# Altium PCB PCB1.PcbDoc
Units mm, origin at the board's own origin, x right, y up, seen from the top; angles counter-clockwise.
Board outline 80 x 31 mm, 2 copper layers (L1, L2), stack 1.594 mm thick; 11 components, 19 nets, 105 pads, 23 vias.
Unrouted connection lines stored in the file: 1.
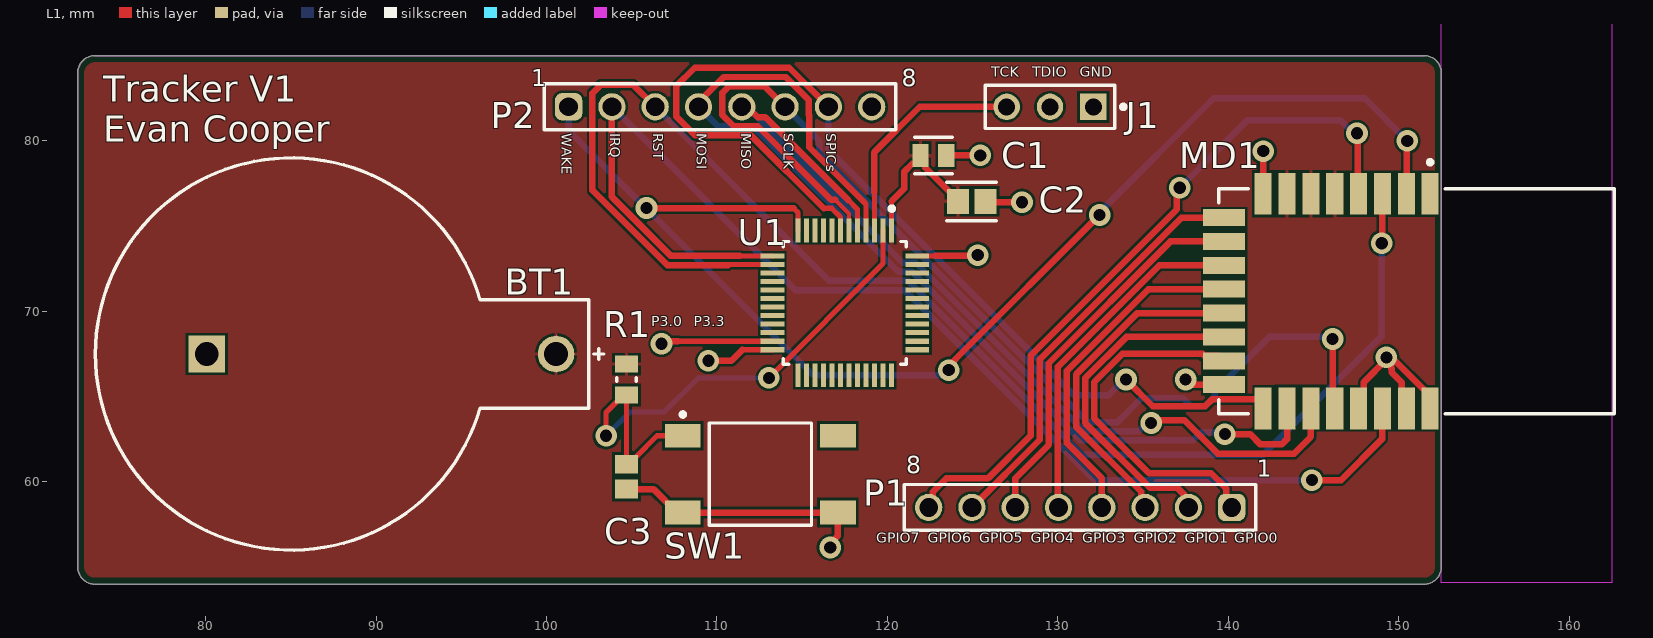
[diagram p0: L1 view]
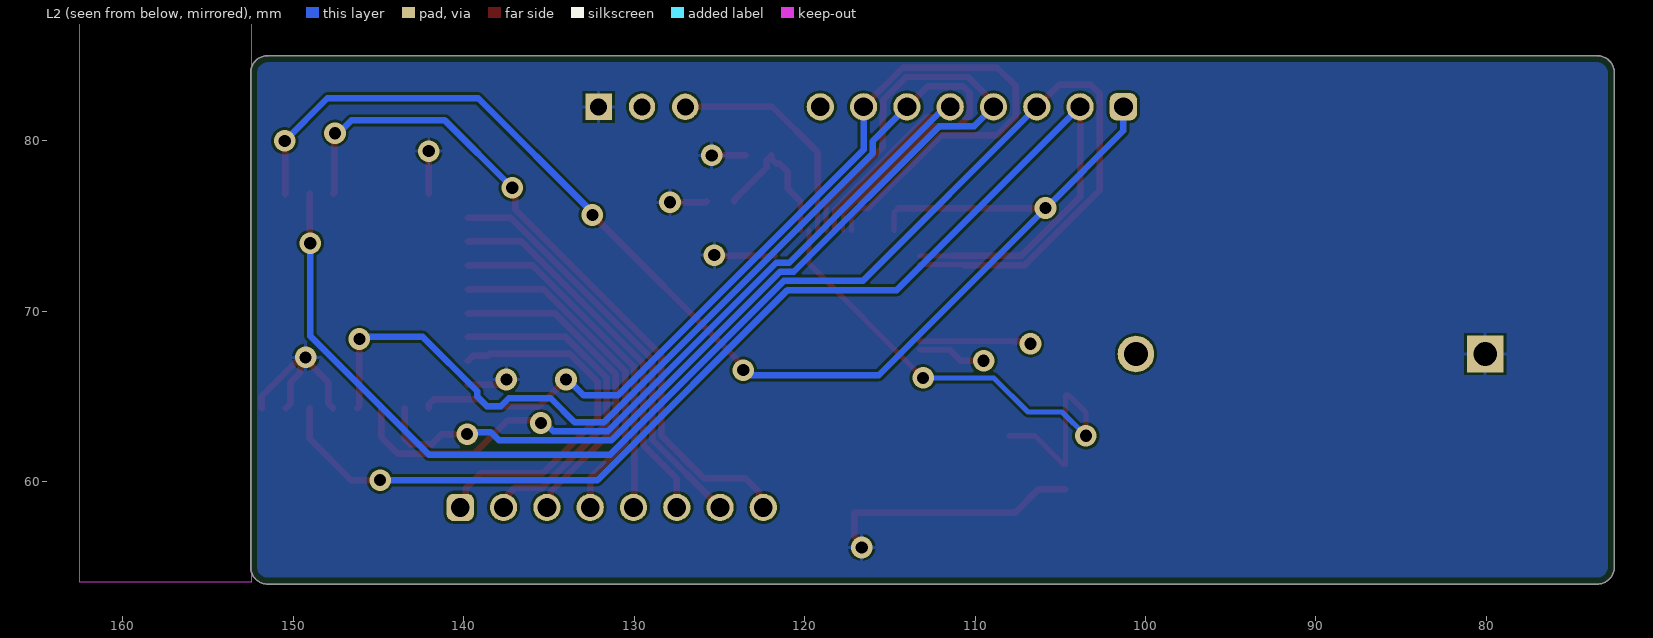
[diagram p1: L2 view, seen from below]
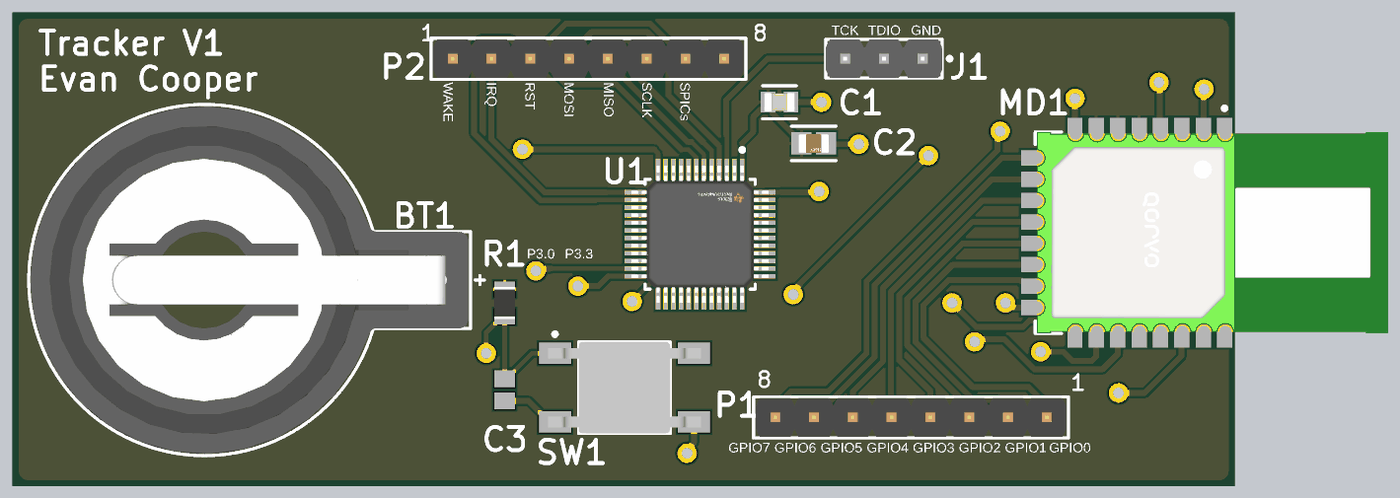
[diagram p2: 3D render of the assembled board from above, using the file's embedded part models]

## Layer stack, top to bottom
Top Solder: solder mask 0.0025, Solder Resist, Dk 1
L1: signal copper 0.035
Core: dielectric 1.524, FR-4, Dk 4.6
L2: signal copper 0.035
Bottom Solder: solder mask 0.0025, Solder Resist, Dk 1

## Board outline
73.5,54 151.5,54 ccw(c151.5,55) 152.5,55 152.5,84 ccw(c151.501,84) 151.501,84.999 73.499,84.999 ccw(c73.499,84) 72.5,84 72.5,55 ccw(c73.5,55)

## Design rules (kind name [scope] priority, off if disabled: settings)
BoardOutlineClearance [All] p1: gap=0.381 ignorepadtopadclearanceinfootprint=FALSE
Clearance [All] p1: gap=0.152 ignorepadtopadclearanceinfootprint=FALSE
ComponentClearance [All] p1: gap=0.025 collisioncheckmode=3 verticalgap=0.025 showdistances=FALSE
DiffPairsRouting [All] p1: maxlimit=10 minlimit=0.152 mostfreqgap=0.203 toplayer_minwidth=0.152 toplayer_maxwidth=0.381 toplayer_prefwidth=0.203 bottomlayer_minwidth=0.152 bottomlayer_maxwidth=0.381 bottomlayer_prefwidth=0.203 substack1={0B7C5F7A-8336-4FBE-85F9-299DA205205F} toplayer_{0b7c5f7a-8336-4fbe-85f9-299da205205f}_minwidth=0.381 toplayer_{0b7c5f7a-8336-4fbe-85f9-299da205205f}_maxwidth=0.381 toplayer_{0b7c5f7a-8336-4fbe-85f9-299da205205f}_prefwidth=0.381 bottomlayer_{0b7c5f7a-8336-4fbe-85f9-299da205205f}_minwidth=0.381 bottomlayer_{0b7c5f7a-8336-4fbe-85f9-299da205205f}_maxwidth=0.381 bottomlayer_{0b7c5f7a-8336-4fbe-85f9-299da205205f}_prefwidth=0.381 substack2={6D2DA1B5-E15E-444F-818C-66341082B678} toplayer_{6d2da1b5-e15e-444f-818c-66341082b678}_minwidth=0.381 toplayer_{6d2da1b5-e15e-444f-818c-66341082b678}_maxwidth=0.381 toplayer_{6d2da1b5-e15e-444f-818c-66341082b678}_prefwidth=0.381 bottomlayer_{6d2da1b5-e15e-444f-818c-66341082b678}_minwidth=0.381 bottomlayer_{6d2da1b5-e15e-444f-818c-66341082b678}_maxwidth=0.381 bottomlayer_{6d2da1b5-e15e-444f-818c-66341082b678}_prefwidth=0.381 maxuncoupledlength=12.7
HoleSize [All] p1: absolutevalues=TRUE maxlimit=6.731 minlimit=0.33 maxpercent=80.000 minpercent=20.000
HoleToHoleClearance [All] p1: gap=0.254 allowstackedmicrovias=FALSE
MinimumAnnularRing [All] p1: minimumring=0.178
MinimumSolderMaskSliver [All] p1: minsoldermaskwidth=0
PlaneClearance [All] p1: clearance=0.254
PlaneConnect [All] p1: planeconnectstyle=Direct reliefexpansion=0.406 reliefentries=4 reliefconductorwidth=0.152 reliefairgap=0.152
PolygonConnect [All] p1: connectstyle=Relief reliefconductorwidth=0.203 reliefentries=4 polygonreliefangle="90 Angle" airgapwidth=0.152
RoutingCorners [All] p1: cornerstyle=45-Degree minsetback=1.25 maxsetback=1.25
RoutingVias [All] p1: holewidth=0.381 width=0.762 viastyle="Through Hole" minholewidth=0.33 minwidth=0.686 maxholewidth=2.54 maxwidth=2.896
SilkToSilkClearance [All] p1: silktosilkclearance=0
SilkToSolderMaskClearance [IsPad] p1: minsilkscreentomaskgap=0.152 clearancetoexposedcopper=TRUE
SolderMaskExpansion [All] p1: expansion=0.075 istentingtop=FALSE
Width [All] p1: maxlimit=10.16 minlimit=0.152 preferedwidth=0.254 bottomlayer_prefwidth=0.203 substack1={0B7C5F7A-8336-4FBE-85F9-299DA205205F} toplayer_{0b7c5f7a-8336-4fbe-85f9-299da205205f}_prefwidth=0.203 bottomlayer_{0b7c5f7a-8336-4fbe-85f9-299da205205f}_prefwidth=0.203 substack2={6D2DA1B5-E15E-444F-818C-66341082B678} toplayer_{6d2da1b5-e15e-444f-818c-66341082b678}_prefwidth=0.203 bottomlayer_{6d2da1b5-e15e-444f-818c-66341082b678}_prefwidth=0.203 minimp=50.000000 maximp=50.000000 favimp=50.000000
20 further rules are at their usual default settings.

## Components (designator, comment, footprint, x,y, rotation, side; value= is the part's Value field where it differs from the comment)
BT1 "101" FP-101-MFG 88,67.5 r0 top
C1 "C0805C106K8PACTU" FP-C0805C-DG-MFG 122.7,79.15 r0 top value=10uF
C2 "08051C104K4T2A" FP-0805-L_2_01_0_2-W_1_25-IPC_B 124.944,76.45 r0 top (schematic designator C?)
C3 "VJ0805D102KXAAJ" CAPC2013X145X48LL20T23 104.7,60.3 r90 top
J1 "90120-0123" FP-90120-0123-MFG 129.54,82 r180 top
MD1 "DWM1000" FP-DWM1000-MFG 151.045,70.6 r270 top
P1 "61300811121" 61300811121 131.31,58.5 r180 top
P2 "61300811121" 61300811121 110.19,82 r0 top
R1 "RC0805FR-0747KL" RESC2013X60X35NL10T20 104.7,66 r90 top
SW1 "FSM4JSMATR" TECO-FSM4JSMATR_V 112.55,60.45 r90 top
U1 "MSP430FR2476TPTR" FP-PT0048A-MFG 117.5,70.5 r270 top

## Footprints (in the part's own frame and the unit in brackets; to place one, negate y for a bottom-side part, rotate by r counter-clockwise, add the part's x,y. Pads: shape width x height; smd on the part's side, far side on the other; paste and mask are expansions set on the pad)
61300811121 [mm] "Pin Header, pitch 2.54 mm, THT, Vertical, single row, 8p"
  rrect50% 1.6x1.6 hole 1.1: 1(-8.89,0)
  round 1.6 hole 1.1: 2(-6.35,0) 3(-3.81,0) 4(-1.27,0) 5(1.27,0) 6(3.81,0) 7(6.35,0) 8(8.89,0)
  silkscreen extent -10.31,-1.34 10.31,1.35, body extent -10.16,-1.27 10.16,1.27, height 8.57
CAPC2013X145X48LL20T23 [mm] "Chip Capacitor, 2-Leads, Body 2.00x1.25mm, IPC High Density"
  rect 1.1x1.35 smd: 1(-0.725,0) 2(0.725,0)
  body extent -1.1,-0.72 1.1,0.72, height 1.45
FP-101-MFG [mm]
  rect 2.145x2.145 hole 1.395 paste-2539.97 mask+0: 1(-7.925,0)
  round 2.145 hole 1.395 paste-2539.97 mask+0: 2(12.565,0)
  silkscreen extent -14.46,-11.5 15.38,11.5, body extent -14.37,-11.38 14.34,11.38, height 10.77
FP-0805-L_2_01_0_2-W_1_25-IPC_B [mm]
  rect 1.305x1.456 smd paste+0 mask+0: 1(-0.806,0) 2(0.806,0)
  silkscreen extent -1.46,-1.13 1.46,1.13, body extent -1.71,-0.98 1.71,0.98, height 0.25
FP-90120-0123-MFG [mm]
  rect 1.55x1.55 hole 1 paste-2539.97 mask+0: 1(-2.54,0)
  round 1.55 hole 1 paste-2539.97 mask+0: 2(0,0) 3(2.54,0)
  silkscreen extent -4.43,-1.27 3.81,1.27, body extent -3.91,-1.37 3.91,1.37, height 0.25
FP-C0805C-DG-MFG [mm]
  rect 0.95x1.35 smd paste+0 mask+0: 1(-0.75,0) 2(0.75,0)
  silkscreen extent -1.11,-1.08 1.1,1.07, body extent -1.4,-0.85 1.4,0.85, height 0.25
FP-DWM1000-MFG [mm]
  rect 2.45x1 smd paste+0 mask+0: 1(-6.295,0.8) 2(-6.295,-0.6) 3(-6.295,-2) 4(-6.295,-3.4) 5(-6.295,-4.8) 6(-6.295,-6.2) 7(-6.295,-7.6) 8(-6.295,-9) 17(6.295,-9) 18(6.295,-7.6) 19(6.295,-6.2) 20(6.295,-4.8) 21(6.295,-3.4) 22(6.295,-2) 23(6.295,-0.6) 24(6.295,0.8)
  rect 1x2.45 smd paste+0 mask+0: 9(-4.9,-11.295) 10(-3.5,-11.295) 11(-2.1,-11.295) 12(-0.7,-11.295) 13(0.7,-11.295) 14(2.1,-11.295) 15(3.5,-11.295) 16(4.9,-11.295)
  Keep-Out Layer region: -16.501,1.411 16.499,1.411 16.499,11.486 -16.501,11.486
  Keep-Out Layer region: -16.501,1.411 16.499,1.411 16.499,11.486 -16.501,11.486
  silkscreen extent -8.27,-11.6 6.6,11.6, body extent -7.62,-12.62 7.62,11.7, height 0.25
FP-PT0048A-MFG [mm]
  rect 1.4x0.3 smd paste-1000 mask+0: 1(-4.25,2.75) 2(-4.25,2.25) 3(-4.25,1.75) 4(-4.25,1.25) 5(-4.25,0.75) 6(-4.25,0.25) 7(-4.25,-0.25) 8(-4.25,-0.75) 9(-4.25,-1.25) 10(-4.25,-1.75) 11(-4.25,-2.25) 12(-4.25,-2.75) 25(4.25,-2.75) 26(4.25,-2.25) 27(4.25,-1.75) 28(4.25,-1.25) 29(4.25,-0.75) 30(4.25,-0.25) 31(4.25,0.25) 32(4.25,0.75) 33(4.25,1.25) 34(4.25,1.75) 35(4.25,2.25) 36(4.25,2.75)
  rect 0.3x1.4 smd paste-1000 mask+0: 13(-2.75,-4.25) 14(-2.25,-4.25) 15(-1.75,-4.25) 16(-1.25,-4.25) 17(-0.75,-4.25) 18(-0.25,-4.25) 19(0.25,-4.25) 20(0.75,-4.25) 21(1.25,-4.25) 22(1.75,-4.25) 23(2.25,-4.25) 24(2.75,-4.25) 37(2.75,4.25) 38(2.25,4.25) 39(1.75,4.25) 40(1.25,4.25) 41(0.75,4.25) 42(0.25,4.25) 43(-0.25,4.25) 44(-0.75,4.25) 45(-1.25,4.25) 46(-1.75,4.25) 47(-2.25,4.25) 48(-2.75,4.25)
  silkscreen extent -5.65,-3.6 3.6,3.6, body extent -5.05,-5.05 5.05,5.05, height 0.25
RESC2013X60X35NL10T20 [mm] "Chip Resistor, 2-Leads, Body 2.1x1.35mm, IPC Medium Density"
  rect 1x1.35 smd: 1(-0.9,0) 2(0.9,0)
  silkscreen extent -0.1,-0.58 0.1,0.58, body extent -1.05,-0.68 1.05,0.67, height 0.6
TECO-FSM4JSMATR_V [mm] "SMD, 4-Leads, Body 6x6mm, Pitch 4.5mm"
  rect 1.4x2.1 smd: 1(2.25,4.55) 2(2.25,-4.55) 3(-2.25,4.55) 4(-2.25,-4.55)
  silkscreen extent -3,-3 3.62,4.67, body extent -3,-5 3,5, height 5.08

## Part data
BT1: library part CMP-19636-000018-1, "BATTERY HOLDER COIN 20MM PC PIN", Max Operating Temperature=145°C, Min Operating Temperature=-50°C, Package Quantity=1, Body Material=PBT, Contact Plating=Tin, Lead Free="Lead Free", Material=Steel, Mount="Through Hole", Number of Batteries=1, Number of Cells=1, Packaging=Bag, REACH SVHC="No SVHC", Series=-, Termination="PC Pin"
C1: library part CMP-2007-03243-2, "CAP CER 10UF 10V X5R 0805", 3DS Part Number=220-00001, Capacitance=10uF, Manufacturer=Kemet, Package=C0805C-DG, Temperature="-55°C to +85°C", Temperature Characteristic=X5R, Temperature Coefficient=15%, Temperature Range High=+85°C, Temperature Range Low=-55°C, Tolerance=10%, Voltage=10V, Automotive=No, Category=Cap, ComponentLink2Description=Datasheet, ComponentLink2URL=https://content.kemet.com/datasheets/KEM_C1006_X5R_SMD.pdf, Device Class L1="Passive Components", Device Class L2=Capacitors, Device Class L3="Ceramic Capacitors", Digikey Description="CAP CER 10UF 10V X5R 0805", Height=1.4mm, Ipc Land Pattern Name=CAPC200125X125, Lead Free=Yes, Manufacturer Part Number=C0805C106K8PACTU, Material=Ceramic, Mouser Description="CAP CER 10UF 10V X5R 0805", Octopart=https://octopart.com/c0805c106k8pactu-kemet-98697, RoHS=TRUE, Voltage Rating=10V
C2: library part CMP-2007-04172-2, "Automotive Ceramic Capacitor, 0805, 100nF, 10%, X7R, 15%, 100V", Capacitance=100nF, Case Code (Imperial)=0805, Case Code (Metric)=2012, Dielectric=X7R, Dielectric Material=Ceramic, Max Operating Temperature=125°C, Min Operating Temperature=-55°C, Package Quantity=1, Ratings=AEC-Q200, Tolerance=10%, Voltage=100V, Case/Package=0805, Construction=Flat, Depth=1.25mm, Height=1.4mm, Lead Free="Lead Free", Length=2.01mm, Mount="Surface Mount", Number of Pins=2, Packaging="Tape and Reel", Radiation Hardening=No, REACH SVHC="No SVHC", RoHS Compliant=Yes, Series=-, Termination=SMD/SMT, Thickness=0.055inch, Voltage Rating=100V, Voltage Rating (DC)=100V, Width=0.049inch
C3: library part CMP-2007-03135-1, Manufacturer=Vitramon, Part Number=VJ0805D102KXAAJ
J1: library part CMP-04776-000237-1, "CONN HEADER VERT 3POS 2.54MM", Color=Black, Contact Resistance=20mR, Current Rating=3A, Max Operating Temperature=125°C, Max Voltage Rating (DC)=350.35kV, Min Operating Temperature=-55°C, Voltage Rating=350V, Contact Gender=Male, Contact Material=Brass, Contact Mating Length=6.75mm, Contact Plating=Tin, Contact Post Length=2.9mm, Gender=Male, Glow Wire Compliant=Non-compliant, Housing Color=Black, Housing Material=Polyester, Lead Free="Lead Free", Mount="Through Hole", Number of Circuits=3, Number of Contacts=3, Number of Positions=3, Number of Rows=1, Orientation=Vertical, Packaging=Tray, Pitch=2.54mm, Radiation Hardening=No, REACH SVHC="No SVHC", RoHS Compliant=Yes, Series=90120, Termination=Solder, Voltage Rating (AC)=350V
MD1: library part CMP-231853-000001-1, "RX TXRX MODULE 802.15.4 CHIP SMD"
P1 P2: library part CMP-1502-01076-2, Color=Black, Contact Resistance=20mΩ, Current Rating=3A, Max Operating Temperature=105°C, Min Operating Temperature=-40°C, Operating Supply Voltage=250V, Connector Type="Male Pin", Contact Material=Copper, Contact Mating Length=5.9944mm, Contact Plating=Gold, Gender=Male, Height=8.54mm, Lead Pitch=2.54mm, Mount="Through Hole", NexarPartId=32855533, Number of Contacts=8, Number of Pins=8, Number of Positions=8, Number of Rows=1, Orientation=Vertical, Packaging=Bulk, Pitch=2.54mm, REACH SVHC=Unknown, RoHS=Compliant, Termination=Solder, Voltage Rating=250V
R1: library part CMP-1659-00011-4, "Chip Resistor, 47 KOhm, +/- 1%, 0.125 W, -55 to 155 degC, 0805 (2012 Metric), RoHS, Tape and Reel", Manufacturer=Yageo, Max Operating Temperature="155 degC", Min Operating Temperature="-55 degC", Package Quantity=200, Voltage Rating="150 V", ComponentLink1Description="Manufacturer URL", ComponentLink1URL=http://www.yageo.com/, ComponentLink2Description=Datasheet, ComponentLink2URL=http://www.yageo.com/documents/recent/PYu-RC_Group_51_RoHS_L_04.pdf, DatasheetVersion="Rev. 4, 02/2016", Height="0.5 mm", Length="2 mm", Mount="Surface Mount", Mounting Technology="Surface Mount", PackageDescription="2-Pin Surface Mounted Device, Body 2 x 1.25 mm", PackageReference=0805, Packaging="Tape and Reel", Pins=2, REACH SVHC="No SVHC", RoHSCompliant=true
SW1: library part CMP-2000-07486-1, "Micro Miniature Push Button Switch FSM JSM, 50 mA, -35 to 85 degC, 4-Pin SMD, RoHS, Tape and Reel", Capacitance=0f, Case\/Package=SMD/SMT, Contact Current Rating=50mA, Contact Resistance=100mOhm, Manufacturer="TE Connectivity", Max Operating Temperature=85degC, Max Voltage Rating (DC)=12V, Min Operating Temperature=-35degC, Operating Force=160gf, Package Description="4-Pin Surface Mount Device, Body 6 x 6 mm, Pitch 4.5 mm", Package Quantity=1200, Voltage Rating (DC)=24V, Actuator Length=0.055inch, Actuator Material=Polyamide, Contact Material=CopperAlloy, Contact Plating=Silver, Current Rating=50mA, Datasheet URL=http://www.te.com/commerce/DocumentDelivery/DDEController?Action=showdoc&DocId=Customer+Drawing%7F2-1437565-7%7FV%7Fpdf%7FEnglish%7FENG_CD_2-1437565-7_V.pdf%7F4-1437565-2, Datasheet Version="Rev. V, 02/2015", Electrical Life=100000Cycles, Illumination Type=Illuminated, Manufacturer URL=http://www.te.com/, Mechanical Life=100000Cycles, Mount=SurfaceMount, Mounting Technology=SurfaceMount, Orientation=Straight, Package Reference=FSM4JSMATR, Packaging=TapeandReel, REACH SVHC=Unknown, RoHSCompliant=true, Switch Travel=0.25mm, Termination=GullWing, Throw Configuration=SPST
U1: library part CMP-04869-000090-1, "IC MCU 16BIT 64.5KB FRAM 48LQFP"

## Via types
v1: diameter 1.27, hole 0.711, L1 to L2, 23 vias

## Nets (pads, with @x,y where several pads share a name; then routed paths per layer and width w, separated by ;. In a path a pad name is that pad's centre, name@x,y a point inside that pad or via, vN(x,y) a via of type N, cw(c..) or ccw(c..) an arc to the next point about the centre after c; other vN are vias at no path point)
GND: BT1.1 C1.2 C2.2 C3.1 J1.1 MD1.8 MD1.16 MD1.21 MD1.23 MD1.24 SW1.3 SW1.4 U1.48 | length 38.8
  L1 w0.305: U1.48 122.8,73.25
  L1 w0.381: C3.1 106.275,59.575 107.65,58.2 SW1.3 SW1.4 117.1,56.841 116.65,56.391 v1(116.65,56.15) ; 122.8,73.25 125.25,73.25 v1(125.3,73.3) ; C1.2 v1(125.45,79.15) ; C2.2 125.8,76.4 v1(127.9,76.4) ; v1(137.5,66) 137.741,66 138.041,65.7 MD1.16 ; MD1.8 142.048,76.897 142.048,79.398 v1(142.05,79.4) ; MD1.21 147.955,64.615 147.955,65.855 149.272,67.172 v1(149.272,67.3) ; v1@149.4,67.3 149.57,67.13 149.442,67.002 149.442,66.889 149.57,66.761 149.57,66.637 149.575,66.632 149.575,66.425 150.184,65.816 150.184,64.566 MD1.23 ; v1@149.658,67.155 149.683,67.13 149.745,67.13 151.845,65.03 MD1.24
GPIO0: MD1.15 P1.1 | length 21.3
  L1 w0.381: MD1.15 139.44,67.409 138.583,67.409 138.492,67.5 133.78,67.5 132.134,65.853 132.134,63.716 135.35,60.5 139,60.5 139.894,59.606 139.894,58.806 P1.1
GPIO1: MD1.14 P1.2 | length 20.2
  L1 w0.381: P1.2 137.427,58.733 137.427,59.233 137.017,59.643 135.416,59.643 131.6,63.458 131.6,66.074 134.026,68.5 MD1.14
GPIO2: MD1.13 P1.3 | length 19.7
  L1 w0.381: P1.3 134.887,58.733 134.887,59.418 131.067,63.237 131.067,66.295 134.672,69.9 MD1.13
GPIO3: MD1.12 P1.4 | length 20.1
  L1 w0.381: P1.4 132.58,60.22 130.534,62.266 130.534,66.516 135.317,71.3 MD1.12
GPIO4: MD1.11 P1.5 | length 20.5
  L1 w0.381: P1.5 130,58.54 130,66.737 135.963,72.7 MD1.11
GPIO5: MD1.10 P1.6 | length 22.5
  L1 w0.381: P1.6 127.5,60.2 129.467,62.167 129.467,66.958 136.609,74.1 MD1.10
GPIO6: MD1.9 P1.7 | length 24.6
  L1 w0.381: P1.7 128.933,62.473 128.933,67.179 137.254,75.5 MD1.9
GPIO7: MD1.4 P1.8 | length 42.2
  L1 w0.381: P1.8 122.653,58.733 122.653,59.395 123.458,60.2 125.9,60.2 128.4,62.7 128.4,67.4 136.98,75.98 136.98,77.08 v1(137.15,77.25) ; v1(147.55,80.45) 147.598,80.402 147.598,76.942 MD1.4
  L2 w0.381: v1(137.15,77.25) 141.1,81.2 146.594,81.2 147.344,80.45 v1(147.55,80.45)
IRQ: MD1.22 P2.2 U1.13 | length 73.2
  L1 w0.305: 111.35,73.25 U1.13
  L1 w0.381: P2.2 103.84,76.713 107.303,73.25 111.35,73.25 ; v1(144.9,60.1) 146.614,60.1 149.023,62.508 149.023,64.282 MD1.22
  L2 w0.381: P2.2 114.588,71.252 121.003,71.252 132.154,60.1 v1(144.9,60.1)
MISO: MD1.19 P2.5 U1.5 | length 54.9
  L1 w0.305: 117.718,76.518 118.25,75.986 U1.5
  L1 w0.381: P2.5 111.79,82 112.399,81.39 112.845,81.39 117.718,76.518 ; v1(135.476,63.455) 135.646,63.625 137.415,63.625 139.381,61.659 143.87,61.659 144.845,62.633 MD1.19
  L2 w0.381: P2.5 111.75,82 120.898,72.852 121.665,72.852 131.551,62.967 134.747,62.967 135.235,63.455 v1(135.476,63.455)
MOSI: MD1.18 P2.4 U1.4 | length 62
  L1 w0.305: 118.65,76.4 118.75,76.3 U1.4
  L1 w0.381: P2.4 108.92,82.275 110.395,83.75 114.036,83.75 115.397,82.389 115.397,81.527 115.423,81.501 115.423,79.627 118.65,76.4 ; v1(139.8,62.8) 141.281,62.8 141.889,62.192 143.129,62.192 143.445,62.508 MD1.18
  L2 w0.381: P2.4 110.063,80.857 112.093,80.857 120.632,72.318 121.445,72.318 131.33,62.433 137.933,62.433 138.403,62.903 139.697,62.903 v1(139.8,62.8)
RST: MD1.3 P2.3 U1.14 | length 84.8
  L1 w0.305: 110.65,72.717 110.683,72.75 U1.14
  L1 w0.381: P2.3 105.08,83.3 103.2,83.3 102.7,82.8 102.7,82.476 102.697,82.473 102.697,81.527 102.7,81.524 102.7,77.099 107.082,72.717 110.65,72.717 ; v1(149,74) 149.023,74.023 149.023,76.872 MD1.3
  L2 w0.381: P2.3 116.595,71.785 121.224,71.785 131.409,61.6 142.05,61.6 149,68.55 v1(149,74)
SBWTCK: J1.3 U1.3 | length 13.5
  L1 w0.305: 119.217,77 119.25,76.967 U1.3
  L1 w0.381: 119.217,77 119.217,79.317 121.9,82 J1.3
SBWTDIO: C3.2 J1.2 R1.1 SW1.1 U1.2 | length 33.5
  L1 w0.305: v1(103.5,62.7) 103.5,64.075 104.525,65.1 R1.1 C3.2 104.825,61.025 105.223,61.423 105.223,61.43 106.493,62.7 SW1.1 ; v1(113.05,66.1) 119.75,72.8 U1.2
  L2 w0.305: v1(103.5,62.7) 104.9,64.1 106.9,64.1 108.9,66.1 v1(113.05,66.1)
SCLK: MD1.20 P2.6 U1.6 | length 63.5
  L1 w0.254: 116.932,76.549 117.75,75.731 U1.6
  L1 w0.381: P2.6 112.783,83.217 110.717,83.217 110.317,82.817 110.317,81.527 110.987,80.857 112.391,80.857 116.698,76.549 116.932,76.549 ; v1(146.122,68.378) 146.122,64.428 MD1.20
  L2 w0.381: P2.6 116.007,79.993 116.007,79.265 131.772,63.5 133.5,63.5 134.9,64.9 137.356,64.9 137.828,64.428 138.638,64.428 139.211,65 139.211,65.311 142.4,68.5 146,68.5 v1(146.122,68.378)
SPICs: MD1.17 P2.7 U1.7 | length 60.6
  L1 w0.305: 116.267,76.05 116.731,76.05 117.248,75.533 117.248,74.752 U1.7
  L1 w0.381: 116.267,76.05 111.993,80.324 108.726,80.324 107.603,81.447 107.603,83.203 108.7,84.3 114.24,84.3 P2.7 ; v1(134,66) 135.572,64.428 138.638,64.428 139.067,64.857 141.736,64.857 142.045,64.548 MD1.17
  L2 w0.381: P2.7 116.54,79.486 130.959,65.067 132.958,65.067 133.891,66 v1(134,66)
VCC: BT1.2 C1.1 C2.1 MD1.5 MD1.6 MD1.7 R1.2 U1.1 | length 8.8
  L1 w0.305: U1.1 120.25,76.471
  L1 w0.381: 120.25,76.471 120.979,77.2 120.979,78.179 121.465,78.666 121.666,78.666 121.95,78.95 C1.1 122.235,78.866 122.235,78.43 124.138,76.526 C2.1
WAKEUP: MD1.2 P2.1 U1.12 | length 77.8
  L1 w0.305: 114.5,76.05 114.748,75.802 114.748,74.752 U1.12
  L1 w0.381: v1(105.868,76.068) 105.886,76.05 114.5,76.05 ; v1(123.6,66.55) 123.6,66.791 124.047,67.238 124.047,67.247 v1(132.45,75.65) ; MD1.2@150.472,76.867 MD1.2 150.472,76.922 150.472,79.973 v1(150.5,80)
  L2 w0.381: P2.1 101.3,80.6 105.832,76.068 v1(105.868,76.068) ; v1@105.85,76.05 115.65,66.25 123.059,66.25 123.359,66.55 v1(123.6,66.55) ; v1(132.45,75.65) 132.45,75.8 139.15,82.5 148,82.5 v1(150.5,80)
pads on no net: MD1.1 P2.8 SW1.2 U1.8 U1.9 U1.10 U1.11 U1.15 U1.16 U1.17 U1.18 U1.19 U1.20 U1.21 U1.22 U1.23 U1.24 U1.25 U1.26 U1.27 U1.28 U1.29 U1.30 U1.31 U1.32 U1.33 U1.34 U1.35 U1.36 U1.37 U1.38 U1.39 U1.40 U1.41 U1.42 U1.43 U1.44 U1.45 U1.46 U1.47
copper on no net: | length 10.6
  L1 w0.305: 107.711,68.25 113.25,68.25 ; 111.5,67.75 113.25,67.75
  L1 w0.381: v1(106.75,68.1) 106.9,68.25 107.711,68.25 ; v1(109.5,67.1) 110.85,67.1 111.297,67.547 111.5,67.75

## Polygon pours and split planes (outlines as drawn)
GND on L2 "GndPour" (solid, pour order 3): 73.5,54 151.5,54 ccw(c151.5,55) 152.5,55 152.5,84 ccw(c151.501,84) 151.501,84.999 73.499,84.999 ccw(c73.499,84) 72.5,84 72.5,55 ccw(c73.5,55)
VCC on L1 "VccPour" (solid, pour order 2): 73.5,54 151.5,54 ccw(c151.5,55) 152.5,55 152.5,84 ccw(c151.501,84) 151.501,84.999 73.499,84.999 ccw(c73.499,84) 72.5,84 72.5,55 ccw(c73.5,55)

## Keep-outs
Keep-Out Layer:
  the board outline again, w0.001

## Silkscreen, mask and mechanical layers (free items; w line width, h text height)
Top Overlay:
  text "TCK" at 126.1,83.561 h1.02
  text "TDIO" at 128.5,83.561 h1.02
  text "GND" at 131.3,83.561 h1.02
  text "Tracker V1" at 74.004,82.304 h1.52
  text "WAKE" at 100.7,80.455 h1.02 r270
  text "IRQ" at 103.55,80.455 h1.02 r270
  text "RST" at 106.061,80.455 h1.02 r270
  text "MOSI" at 108.606,80.455 h1.02 r270
  text "MISO" at 111.211,80.455 h1.02 r270
  text "SCLK" at 113.711,80.455 h1.02 r270
  text "SPICs" at 116.211,80.455 h1.02 r270
  text "Evan Cooper" at 74.004,79.962 h1.52
  text "P3.0" at 106.15,68.911 h1.02
  text "P3.3" at 108.65,68.911 h1.02
  text "GPIO7" at 119.35,56.211 h1.02
  text "GPIO6" at 122.368,56.211 h1.02
  text "GPIO5" at 125.387,56.211 h1.02
  text "GPIO4" at 128.41,56.211 h1.02
  text "GPIO3" at 131.426,56.211 h1.02
  text "GPIO2" at 134.445,56.211 h1.02
  text "GPIO1" at 137.457,56.211 h1.02
  text "GPIO0" at 140.35,56.211 h1.02

## Text inside footprints (layer, text, board x,y; h text height)
P1: Top Overlay "8" at 121.12,60.5 h1.02; Top Overlay "1" at 141.67,60.3 h1.02
P2: Top Overlay "1" at 99.1,83.2 h1.02; Top Overlay "8" at 120.85,83.2 h1.02